# Altium PCB Micromouse_PCB_Final.PcbDoc (part 1 of 2)
Units mm, origin at the board's own origin, x right, y up, seen from the top; angles counter-clockwise.
Board outline 84.99 x 89.99 mm, 4 copper layers (Top Layer, Mid Layer (GND), Mid Layer (PWR), Bottom Layer), stack 1.591 mm thick; 98 components, 75 nets, 333 pads, 159 vias.
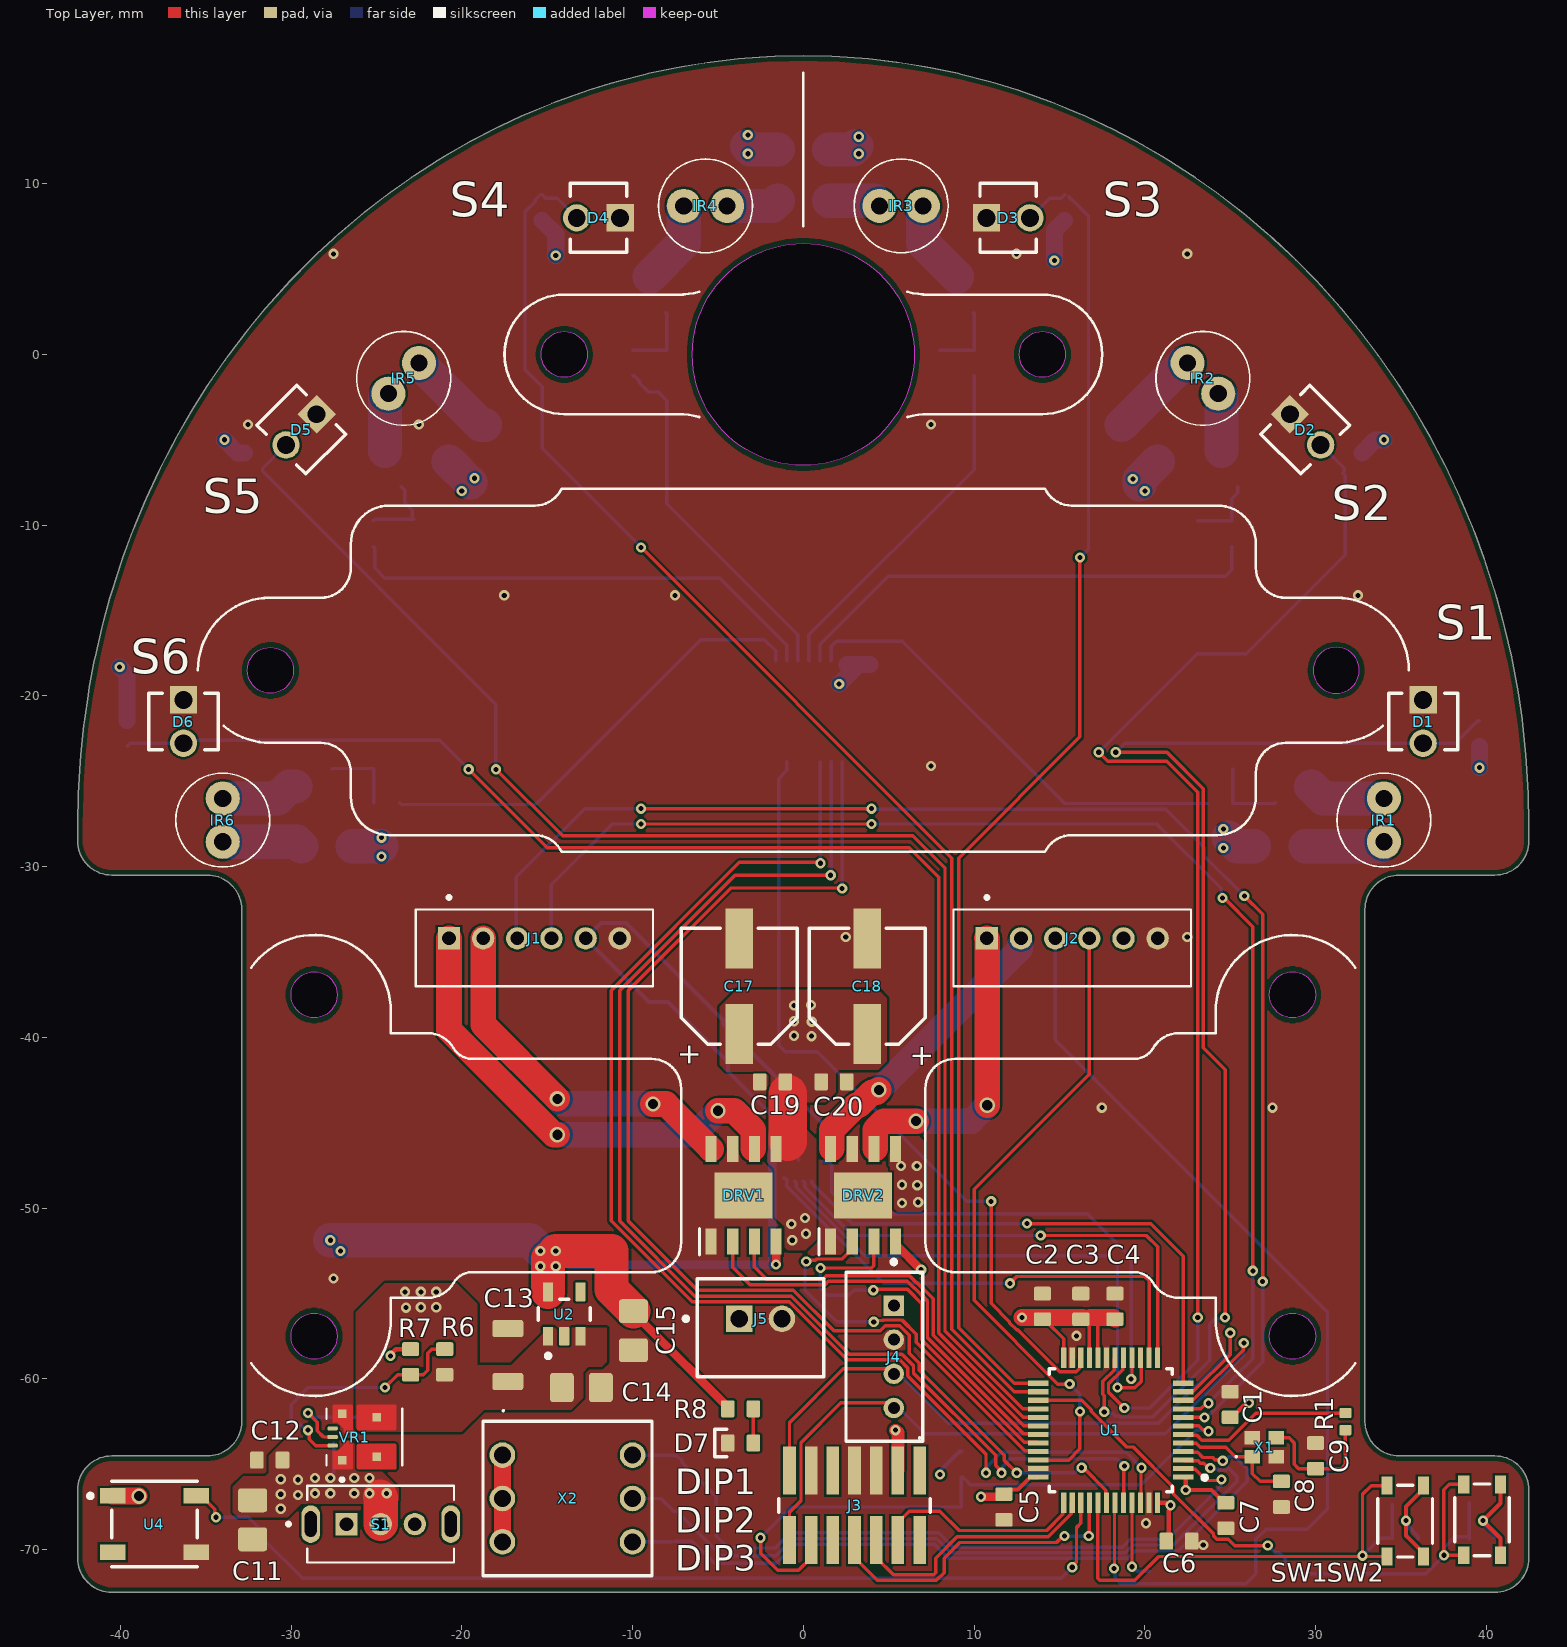
[diagram p0: Top Layer view]
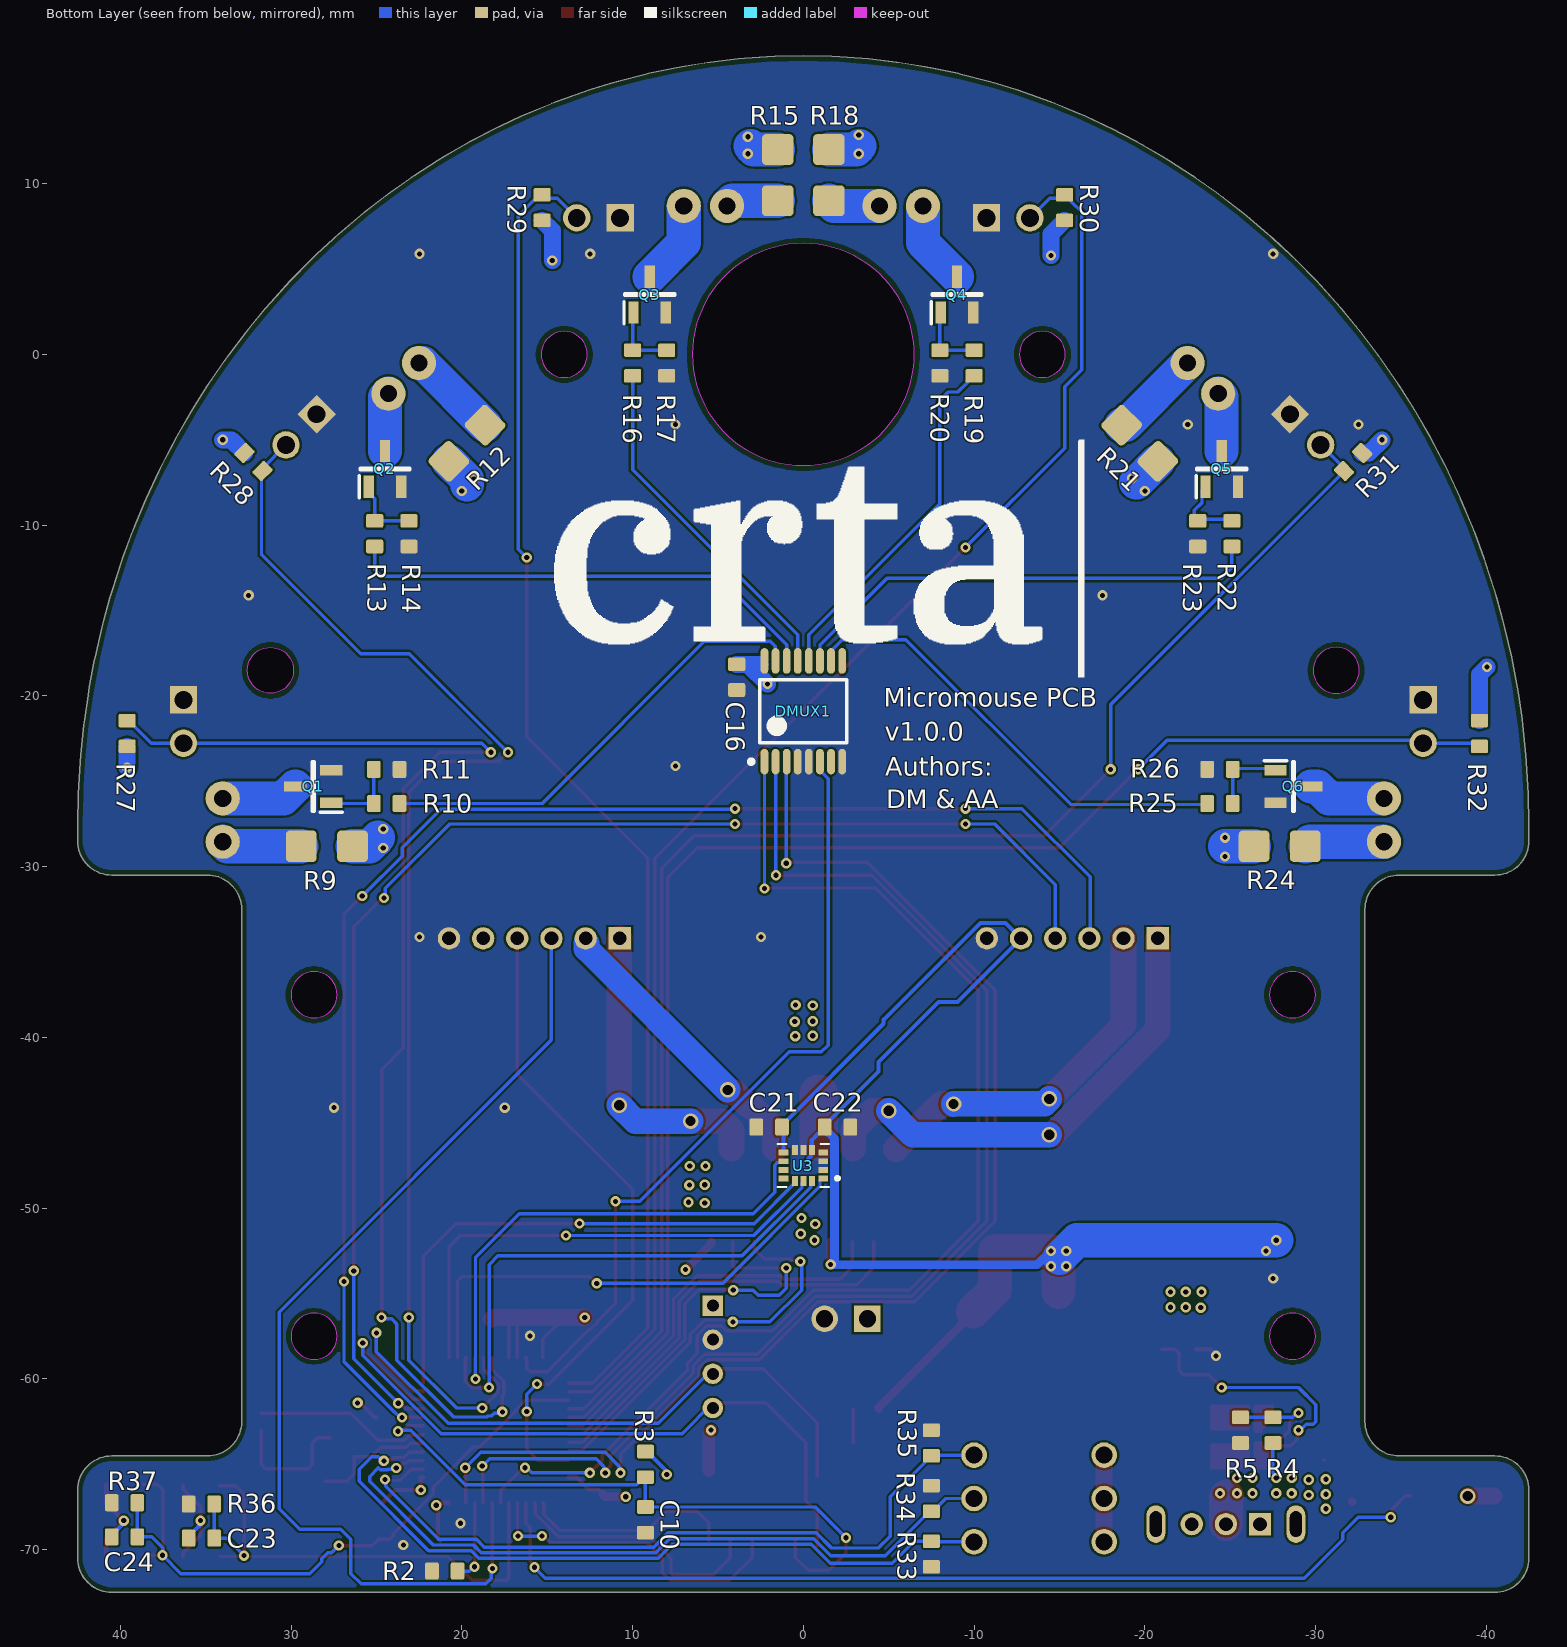
[diagram p1: Bottom Layer view, seen from below]
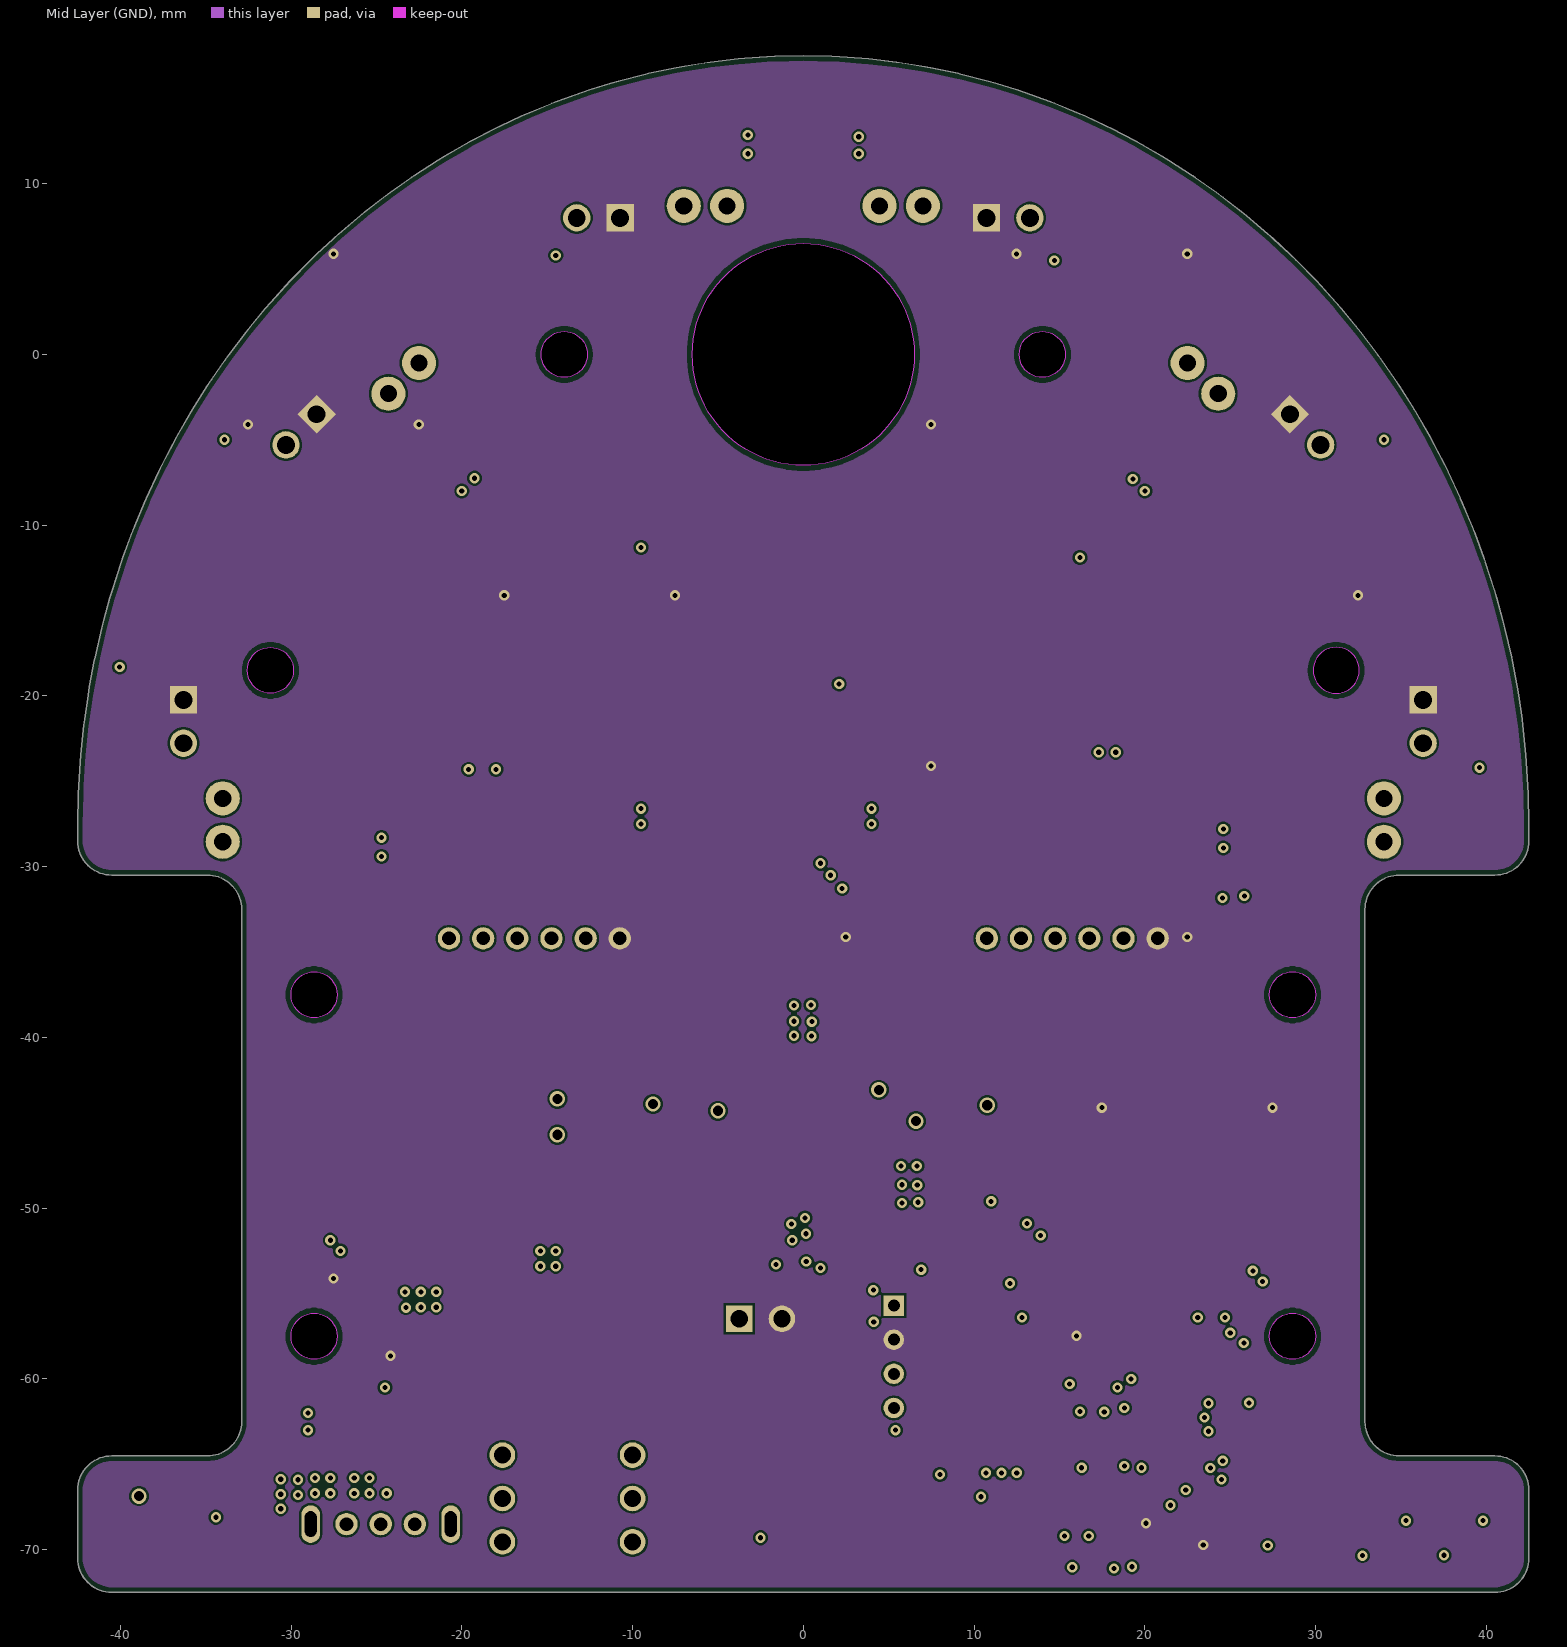
[diagram p2: Mid Layer (GND)]
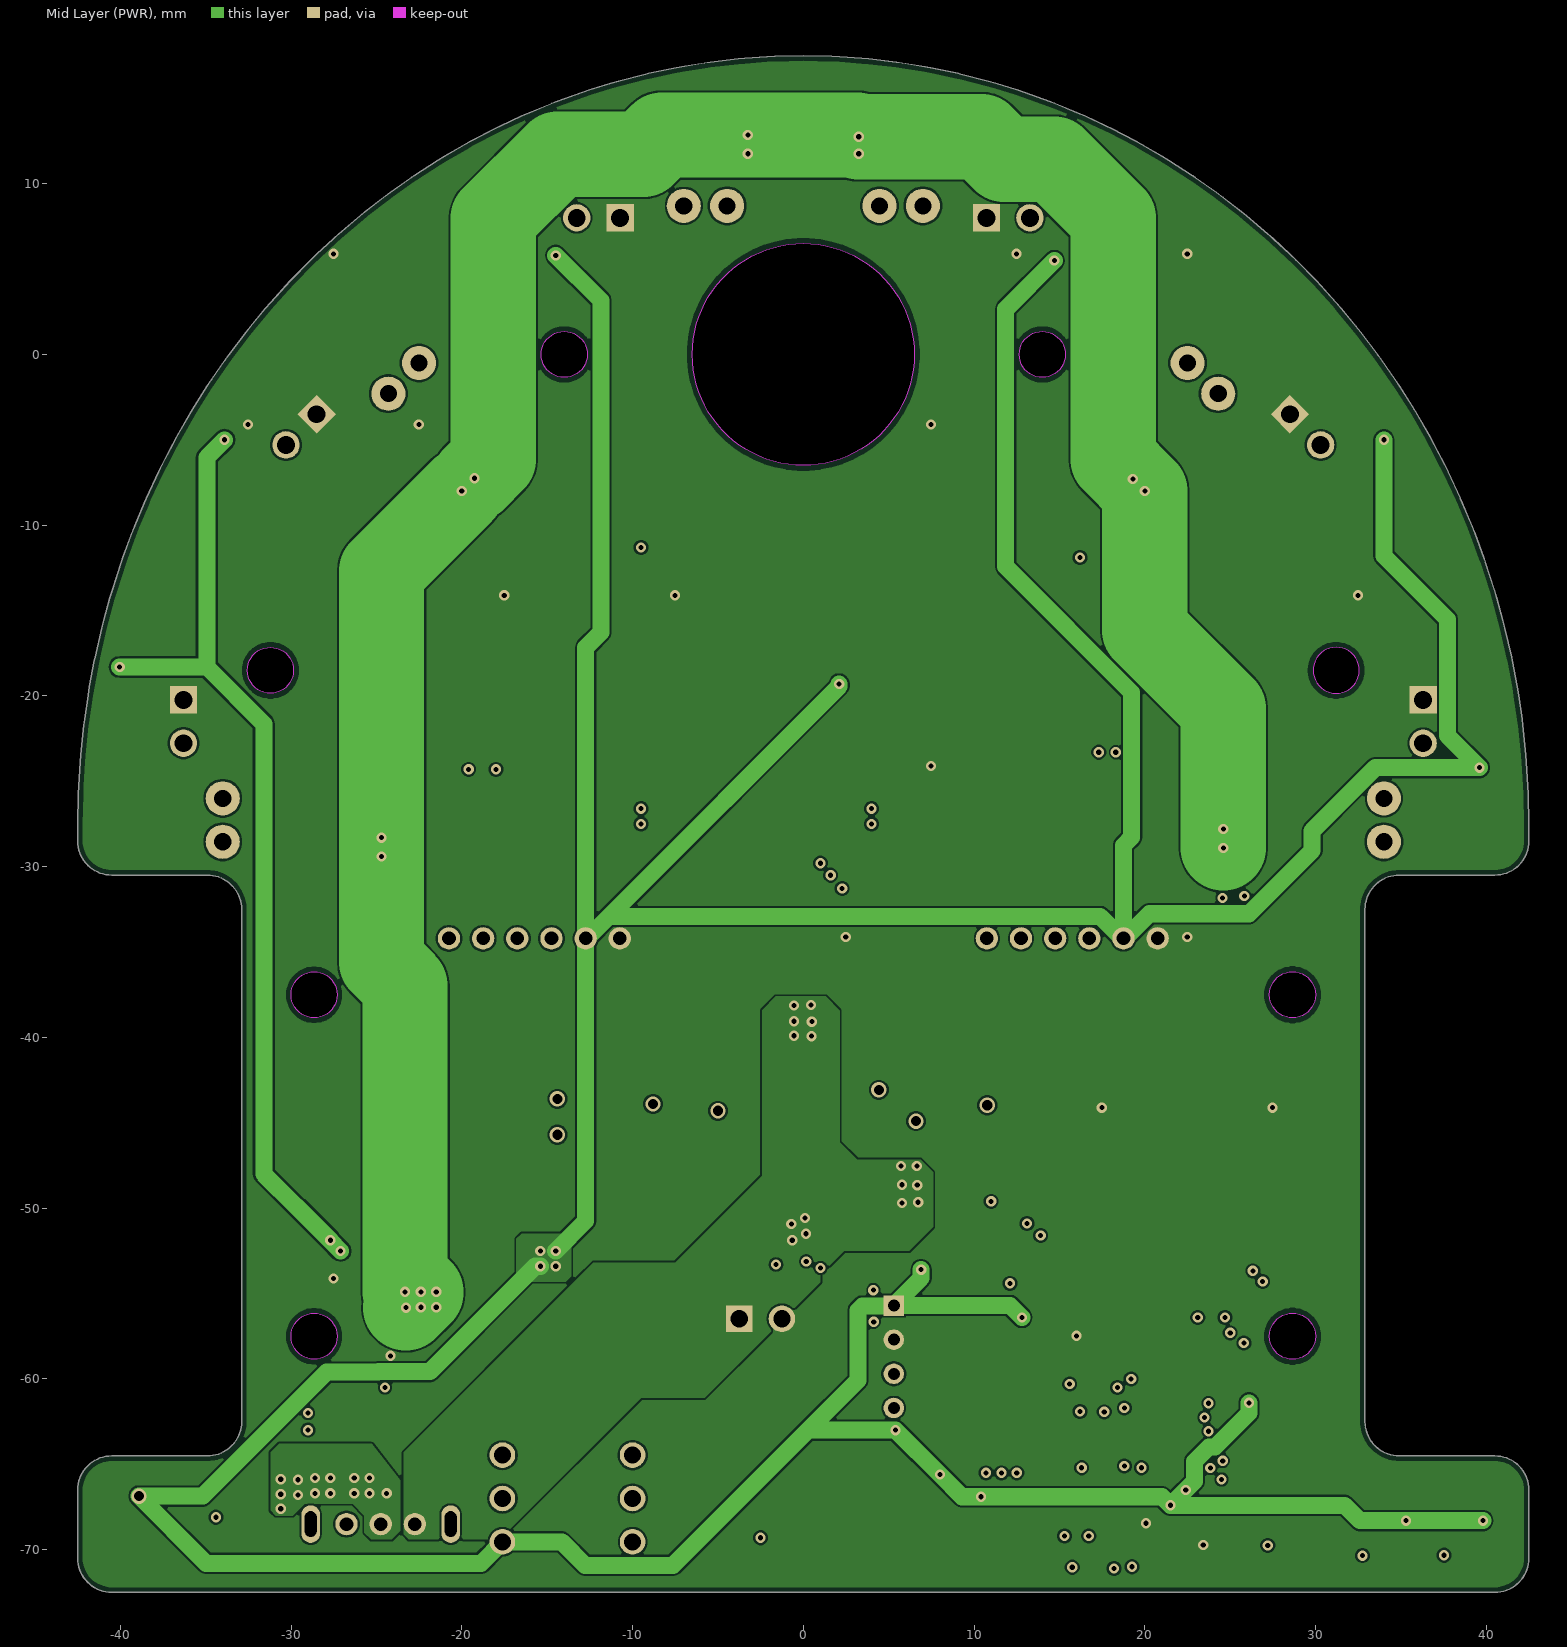
[diagram p3: Mid Layer (PWR)]
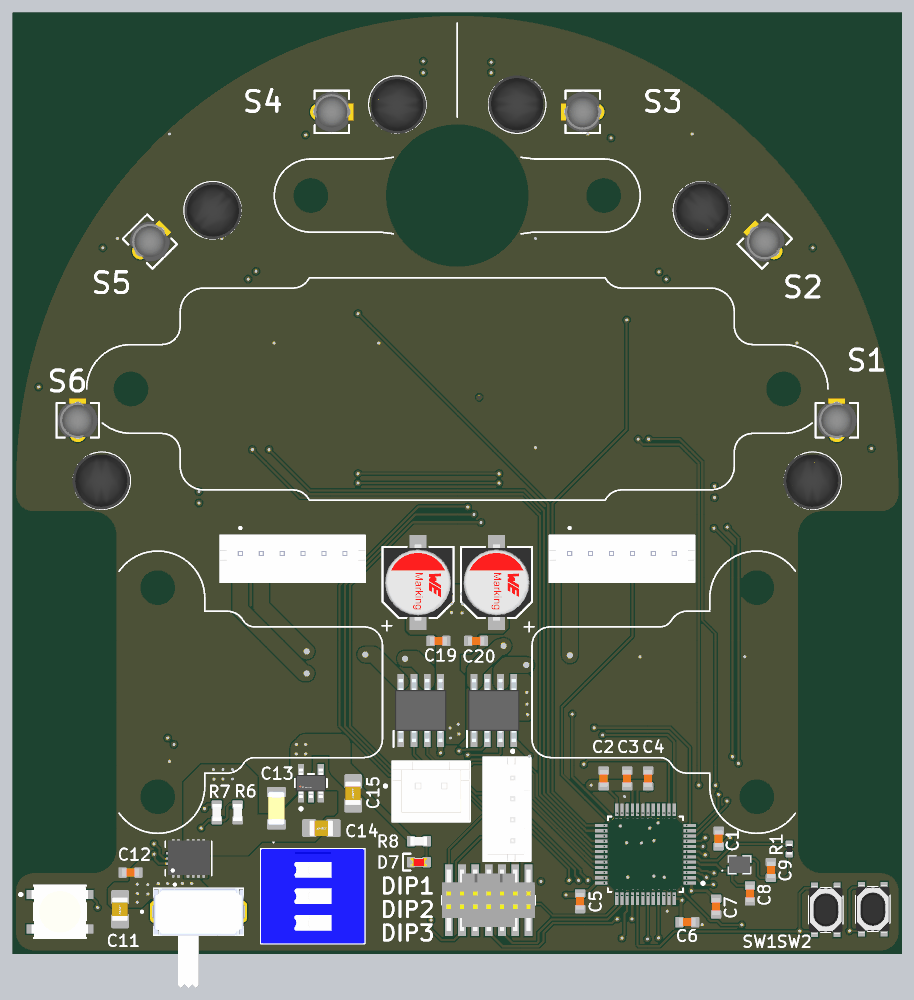
[diagram p5: 3D render of the assembled board from above, using the file's embedded part models]
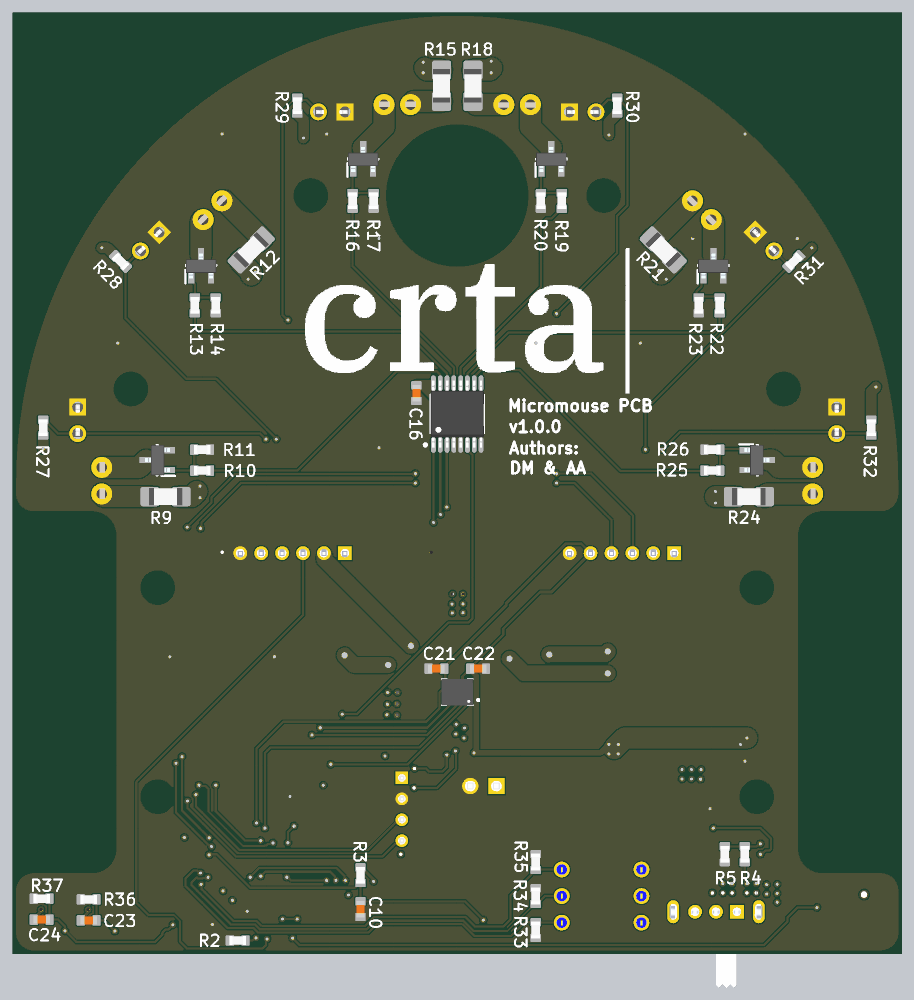
[diagram p6: 3D render of the assembled board from below, using the file's embedded part models]

## Layer stack, top to bottom
Top Solder: solder mask 0.0102, Solder Resist, Dk 3.5
Top Layer: signal copper 0.035
Dielectric 2: prepreg 0.2104, 7628, Dk 4.4
Mid Layer (GND): signal copper 0.0175
Dielectric 1: dielectric 1.065, FR-4, Dk 4.5
Mid Layer (PWR): signal copper 0.0175
Dielectric 3: prepreg 0.2104, 7628, Dk 4.4
Bottom Layer: signal copper 0.035
Bottom Solder: solder mask 0.0102, Solder Resist, Dk 3.5

## Board outline
-42.493,-70.5 -42.493,-66.5 cw(c-40.5,-66.5) -40.5,-64.507 -34.9,-64.507 ccw(c-34.9,-62.5) -32.893,-62.5 -32.893,-32.5 ccw(c-34.9,-32.5) -34.9,-30.493 -40.5,-30.493 cw(c-40.5,-28.5) -42.493,-28.5 -42.493,-27.5 -42.457,-25.746 -42.435,-25.25 -42.35,-23.871 -42.319,-23.454 -42.14,-21.722 -42.091,-21.359 -41.887,-19.957 -41.805,-19.459 -41.513,-17.907 -41.479,-17.73 -41.086,-16.032 -40.967,-15.569 -40.606,-14.258 -40.48,-13.824 -39.95,-12.172 -39.852,-11.899 -39.346,-10.519 -39.162,-10.049 -38.599,-8.694 -38.485,-8.427 -37.757,-6.863 -37.556,-6.461 -36.935,-5.264 -36.711,-4.847 -35.854,-3.353 -35.76,-3.201 -34.93,-1.886 -34.656,-1.473 -33.864,-0.329 -33.656,-0.035 -32.626,1.323 -32.369,1.642 -31.508,2.681 -31.193,3.048 -30.047,4.315 -28.85,5.528 -28.503,5.862 -27.522,6.774 -27.221,7.046 -25.938,8.136 -25.661,8.356 -24.581,9.195 -24.19,9.486 -22.948,10.365 -22.805,10.464 -21.394,11.371 -21,11.609 -19.87,12.265 -19.49,12.478 -18.013,13.249 -17.761,13.37 -16.481,13.966 -16.037,14.161 -14.735,14.697 -14.476,14.801 -12.916,15.361 -12.506,15.495 -11.268,15.877 -10.831,16.004 -9.227,16.419 -9.06,16.456 -7.594,16.764 -7.124,16.851 -5.8,17.067 -5.457,17.119 -3.821,17.308 -3.427,17.341 -2.125,17.432 -1.657,17.455 0,17.493 1.657,17.455 2.125,17.432 3.427,17.341 3.821,17.308 5.457,17.119 5.8,17.067 7.124,16.851 7.594,16.764 9.06,16.456 9.227,16.419 10.831,16.004 11.268,15.877 12.506,15.495 12.916,15.361 14.476,14.801 14.735,14.697 16.037,14.161 16.481,13.966 17.761,13.37 18.013,13.249 19.49,12.478 19.87,12.265 21,11.609 21.394,11.371 22.805,10.464 22.948,10.365 24.19,9.486 24.581,9.195 25.661,8.356 25.938,8.136 27.221,7.046 27.522,6.774 28.503,5.862 28.85,5.528 30.047,4.315 31.193,3.048 31.508,2.681 32.369,1.642 32.626,1.323 33.656,-0.035 33.864,-0.329 34.656,-1.473 34.93,-1.886 35.76,-3.201 35.854,-3.353 36.711,-4.847 36.935,-5.264 37.556,-6.461 37.757,-6.863 38.485,-8.427 38.599,-8.694 39.162,-10.049 39.346,-10.519 39.852,-11.899 39.95,-12.172 40.48,-13.824 40.606,-14.258 40.967,-15.569 41.086,-16.032 41.479,-17.73 41.513,-17.907 41.805,-19.459 41.887,-19.957 42.091,-21.359 42.14,-21.722 42.319,-23.454 42.35,-23.871 42.435,-25.25 42.457,-25.746 42.493,-27.5 42.493,-28.5 cw(c40.5,-28.5) 40.5,-30.493 34.9,-30.493 ccw(c34.9,-32.5) 32.893,-32.5 32.893,-62.5 ccw(c34.9,-62.5) 34.9,-64.507 40.5,-64.507 cw(c40.5,-66.5) 42.493,-66.5 42.493,-70.5 cw(c40.5,-70.5) 40.5,-72.493 -40.5,-72.493 cw(c-40.5,-70.5)
cut-out: 0,-6.5 cw(c0,0) -6.5,0 cw(c0,0) 0,6.5 cw(c0,0) 6.5,0 cw(c0,0)
cut-out: 29.859,-18.5 ccw(c31.208,-18.5) 31.208,-19.85 ccw(c31.208,-18.5) 32.558,-18.5 ccw(c31.208,-18.5) 31.208,-17.15 ccw(c31.208,-18.5)
cut-out: 14,-1.35 cw(c14,0) 12.65,0 cw(c14,0) 14,1.35 cw(c14,0) 15.35,0 cw(c14,0)
cut-out: 27.3,-37.5 cw(c28.65,-37.5) 28.65,-36.15 cw(c28.65,-37.5) 30,-37.5 cw(c28.65,-37.5) 28.65,-38.85 cw(c28.65,-37.5)
cut-out: 27.3,-57.5 cw(c28.65,-57.5) 28.65,-56.15 cw(c28.65,-57.5) 30,-57.5 cw(c28.65,-57.5) 28.65,-58.85 cw(c28.65,-57.5)
cut-out: -14,-1.35 cw(c-14,0) -15.35,0 cw(c-14,0) -14,1.35 cw(c-14,0) -12.65,0 cw(c-14,0)
cut-out: -31.208,-19.85 cw(c-31.208,-18.5) -32.558,-18.5 cw(c-31.208,-18.5) -31.208,-17.15 cw(c-31.208,-18.5) -29.859,-18.5 cw(c-31.208,-18.5)
cut-out: -30,-37.5 cw(c-28.65,-37.5) -28.65,-36.15 cw(c-28.65,-37.5) -27.3,-37.5 cw(c-28.65,-37.5) -28.65,-38.85 cw(c-28.65,-37.5)
cut-out: -30,-57.5 cw(c-28.65,-57.5) -28.65,-56.15 cw(c-28.65,-57.5) -27.3,-57.5 cw(c-28.65,-57.5) -28.65,-58.85 cw(c-28.65,-57.5)
cut-out: 14,-1.35 cw(c14,0) 12.65,0 cw(c14,0) 14,1.35 cw(c14,0) 15.35,0 cw(c14,0)
cut-out: 29.859,-18.5 ccw(c31.208,-18.5) 31.208,-19.85 ccw(c31.208,-18.5) 32.558,-18.5 ccw(c31.208,-18.5) 31.208,-17.15 ccw(c31.208,-18.5)
cut-out: -14,-1.35 cw(c-14,0) -15.35,0 cw(c-14,0) -14,1.35 cw(c-14,0) -12.65,0 cw(c-14,0)
cut-out: -31.208,-19.85 cw(c-31.208,-18.5) -32.558,-18.5 cw(c-31.208,-18.5) -31.208,-17.15 cw(c-31.208,-18.5) -29.859,-18.5 cw(c-31.208,-18.5)

## Design rules (kind name [scope] priority, off if disabled: settings)
BoardOutlineClearance [All] p1: gap=0.3 ignorepadtopadclearanceinfootprint=FALSE
Clearance [All] p1: gap=0.127 ignorepadtopadclearanceinfootprint=TRUE
MinimumAnnularRing [All] p1: minimumring=0.15
MinimumSolderMaskSliver [All] p1: minsoldermaskwidth=0.13
PlaneConnect [All] p1: planeconnectstyle=Direct reliefexpansion=0.508 reliefentries=4 reliefconductorwidth=0.25 reliefairgap=0.2
PolygonConnect [All] p1: connectstyle=Direct reliefconductorwidth=0.254 reliefentries=4 polygonreliefangle="90 Angle" airgapwidth=0.254
RoutingVias [All] p1: holewidth=0.3 width=0.6 viastyle="Through Hole" minholewidth=0.3 minwidth=0.45 maxholewidth=0.75 maxwidth=0.9
SilkToSolderMaskClearance [IsPad] p1: minsilkscreentomaskgap=0.1 clearancetoexposedcopper=TRUE
SolderMaskExpansion [All] p1: expansion=0 istentingtop=FALSE
SupplyNets "Schematic Supply Nets_3" [InNet('+5v')] p1: voltage=0.000
SupplyNets "Schematic Supply Nets_2" [InNet('+3v3')] p2: voltage=0.000
SupplyNets "Schematic Supply Nets_1" [InNet('GND')] p3: voltage=0.000
SupplyNets "Schematic Supply Nets" [InNet('VBAT')] p4: voltage=0.000
UnRoutedNet [All] p1: checkbadconnections=TRUE
Width [All] p1: maxlimit=5 minlimit=0.127 preferedwidth=0.2
26 further rules are at their usual default settings.

## Components (designator, comment, footprint, x,y, rotation, side; value= is the part's Value field where it differs from the comment)
C1 "4u7" CAP_0603 25,-61.5 r270 top
C2 "100n" CAP_0603 14,-55.75 r270 top
C3 "100n" CAP_0603 16.25,-55.75 r270 top
C4 "100n" CAP_0603 18.25,-55.75 r270 top
C5 "100n" CAP_0603 11.75,-67.5 r90 top
C6 "100n" CAP_0603 22,-69.5 r180 top
C7 "100n" CAP_0603 24.75,-68 r90 top
C8 "6p8" CAP_0603 28,-66.75 r90 top
C9 "6p8" CAP_0603 30,-64.5 r270 top
C10 "100n" CAP_0603 9.25,-68.25 r270 bottom
C11 "10u" CAP_0805 -32.25,-68.25 r90 top
C12 "100n" CAP_0603 -31.25,-64.75 r0 top
C13 "47u" CAP_1206 -17.3,-58.6 r270 top
C14 "1u" CAP_0805 -13,-60.5 r180 top
C15 "1u" CAP_0805 -9.95,-57.175 r90 top
C16 "100n" CAP_0603 3.9,-18.9 r90 bottom
C17 "47u" WCAP-ASLI_D6.3H5.5 -3.75,-37 r270 top
C18 "47u" WCAP-ASLI_D6.3H5.5 3.75,-37 r270 top
C19 "100n" CAP_0603 -1.8,-42.6 r0 top
C20 "100n" CAP_0603 1.8,-42.6 r180 top
C21 "100n" CAP_0603 2,-45.25 r0 bottom
C22 "100n" CAP_0603 -2,-45.25 r180 bottom
C23 "100n" CAP_0603 35.25,-69.325 r180 bottom
C24 "100n" CAP_0603 39.75,-69.25 r180 bottom
D1 "TEFT4300" FP-6_544-5269_01-4-MFG 36.3,-21.5 r270 top
D2 "TEFT4300" FP-6_544-5269_01-4-MFG 29.4,-4.4 r315 top
D3 "TEFT4300" FP-6_544-5269_01-4-MFG 12,8 r0 top
D4 "TEFT4300" FP-6_544-5269_01-4-MFG -12,8 r180 top
D5 "TEFT4300" FP-6_544-5269_01-4-MFG -29.4,-4.4 r225 top
D6 "TEFT4300" FP-6_544-5269_01-4-MFG -36.3,-21.5 r270 top
D7 "RED" LED_0603_RED -3.675,-63.75 r0 top
DMUX1 "SN74AHC238PWR" TSOP65P640X120-16N 0,-20.9 r90 bottom
DRV1 "DRV8251DDAR" SOIC127P600X170-9N -3.5,-49.25 r90 top
DRV2 "DRV8251DDAR" SOIC127P600X170-9N 3.5,-49.25 r90 top
IR1 "SFH_4545" SFH4545 34,-26 r270 top
IR2 "SFH_4545" SFH4545 24.3,-2.3 r135 top
IR3 "SFH_4545" SFH4545 7,8.7 r180 top
IR4 "SFH_4545" SFH4545 -7,8.7 r0 top
IR5 "SFH_4545" SFH4545 -24.3,-2.3 r45 top
IR6 "SFH_4545" SFH4545 -34,-26 r270 top
J1 "JST-PH-Left-Motor" JST_B6B-PH-K-S(LF)(SN) -15.75,-34.75 r180 top
J2 "JST-PH-Right-Motor" JST_B6B-PH-K-S(LF)(SN) 15.75,-34.75 r180 top
J3 "STDC14 - SWD" FTSH10701LDVKTR 3,-67.4 r180 top
J4 "B4B-PH-K(LF)(SN)" FP-B4B-PH-K_LF_SN-MFG 4.75,-58.7 r90 top
J5 "B2B-XH-A(LF)(SN)" FP-B2B-XH-A_LF_SN-MFG -2.5,-57 r0 top
Q1 "IRLML6344TRPBF" SOT95P237X112-3N 28.7,-25.3 r0 bottom
Q2 "IRLML6344TRPBF" SOT95P237X112-3N 24.5,-6.7 r90 bottom
Q3 "IRLML6344TRPBF" SOT95P237X112-3N 9,3.5 r90 bottom
Q4 "IRLML6344TRPBF" SOT95P237X112-3N -9,3.5 r90 bottom
Q5 "IRLML6344TRPBF" SOT95P237X112-3N -24.5,-6.7 r90 bottom
Q6 "IRLML6344TRPBF" SOT95P237X112-3N -28.7,-25.3 r180 bottom
R1 "0R" RES_0402 31.75,-62.5 r90 top
R2 "10k" RES_0603 21,-71.25 r180 bottom
R3 "10k" RES_0603 9.25,-65 r270 bottom
R4 "10k" RES_0603 -27.5,-63 r270 bottom
R5 "2k2" RES_0603 -25.6,-63 r90 bottom
R6 "220k" RES_0603 -21,-59 r270 top
R7 "30k" RES_0603 -23,-59 r270 top
R8 "1k" RES_0603 -3.675,-61.75 r180 top
R9 "18" RES_1206 27.9,-28.8 r180 bottom
R10 "100R" RES_0603 24.4,-26.3 r0 bottom
R11 "100k" RES_0603 24.4,-24.3 r0 bottom
R12 "18" RES_1206 19.7,-5.2 r315 bottom
R13 "100R" RES_0603 25.1,-10.5 r90 bottom
R14 "100k" RES_0603 23.1,-10.5 r90 bottom
R15 "18" RES_1206 1.5,10.5 r90 bottom
R16 "100R" RES_0603 10,-0.5 r90 bottom
R17 "100k" RES_0603 8,-0.5 r90 bottom
R18 "18" RES_1206 -1.5,10.5 r90 bottom
R19 "100R" RES_0603 -10,-0.5 r90 bottom
R20 "100k" RES_0603 -8,-0.5 r90 bottom
R21 "18" RES_1206 -19.7,-5.2 r225 bottom
R22 "100R" RES_0603 -25.1,-10.5 r90 bottom
R23 "100k" RES_0603 -23.1,-10.5 r90 bottom
R24 "18" RES_1206 -27.9,-28.8 r0 bottom
R25 "100R" RES_0603 -24.4,-26.3 r180 bottom
R26 "100k" RES_0603 -24.4,-24.3 r180 bottom
R27 "10k" RES_0603 39.6,-22.2 r270 bottom
R28 "10k" RES_0603 32.2,-6.3 r45 bottom
R29 "10k" RES_0603 15.3,8.6 r270 bottom
R30 "10k" RES_0603 -15.3,8.6 r270 bottom
R31 "10k" RES_0603 -32.2,-6.3 r135 bottom
R32 "10k" RES_0603 -39.6,-22.2 r90 bottom
R33 "10k" RES_0603 -7.5,-70.25 r90 bottom
R34 "10k" RES_0603 -7.5,-67 r270 bottom
R35 "10k" RES_0603 -7.5,-63.75 r270 bottom
R36 "10k" RES_0603 35.25,-67.325 r180 bottom
R37 "10k" RES_0603 39.75,-67.25 r180 bottom
S1 "Switch" SW_SLW-864574-5A-RA-N-D -24.75,-68.5 r0 top
SW1 "434123025826" 434123025826 35.25,-68.325 r90 top
SW2 "434123025826" 434123025826 39.75,-68.25 r90 top
U1 "STM32G474CET6" FP-STM32G474CET6-MFG 18,-63 r180 top
U2 "TPS7A2033PDBVR" FP-DBV0005A-MFG -14,-56.2 r90 top
U3 "LSM6DSO32TR" XDCR_LSM6DSO32TR 0,-47.5 r0 bottom
U4 "WS2812B" ADAI-WS2812B_V -38,-68.5 r0 top
VR1 "TPSM863252RDXR" VREG_TPSM863252RDXR -25.665,-63.4 r90 top
X1 "24 MHz HSE" CX2016FB24000B0FZZH1 27,-64 r0 top
X2 "DS01C-254-S-03BE" DS01C254S03BE -17.62,-64.46 r270 top

## Footprints (in the part's own frame and the unit in brackets; to place one, negate y for a bottom-side part, rotate by r counter-clockwise, add the part's x,y. Pads: shape width x height; smd on the part's side, far side on the other; paste and mask are expansions set on the pad)
434123025826 [mm] "Tact Switch, SMD, body 4.2x3.2mm"
  rect 1.05x0.65 smd: A1(-2.075,1.075) A2(2.075,1.075) B1(-2.075,-1.075) B2(2.075,-1.075)
  silkscreen extent -2.1,-1.6 2.1,1.6, body extent -2.3,-1.6 2.3,1.6, height 2.5
ADAI-WS2812B_V [mm] "SMD, 4-Leads, Body 5x5mm, Pitch 3.3mm"
  rect 1.5x0.9 smd: 1(-2.45,1.65) 2(-2.45,-1.65) 3(2.45,-1.65) 4(2.45,1.65)
  silkscreen extent -3.87,-2.5 2.5,2.5, body extent -2.7,-2.5 2.7,2.5, height 1.69
CAP_0603 [mm]
  rrect25% 0.8x1 smd: 1(-0.75,0) 2(0.75,0)
  body extent -0.8,-0.4 0.8,0.4, height 0.51
CAP_0805 [mm]
  rrect25% 1.4x1.7 smd: 1(-1.143,0) 2(1.143,0)
  body extent -1.15,-0.76 1.15,0.79, height 1.01
CAP_1206 [mm]
  rrect25% 1x1.8 smd: 1(-1.55,0) 2(1.55,0)
  body extent -1.6,-0.8 1.6,0.8, height 0.94
CX2016FB24000B0FZZH1 [mm]
  rect 0.9x0.8 smd: 1(-0.7,-0.55) 2(0.7,-0.55) 3(0.7,0.55) 4(-0.7,0.55)
  silkscreen extent -1.7,-0.6 -1.6,-0.5, body extent -1.07,-0.87 1.07,0.87, height 0.65
DS01C254S03BE [mm]
  round 1.5 hole 1: 1(0,0) 2(0,7.62) 3(2.54,0) 4(2.54,7.62) 5(5.08,0) 6(5.08,7.62)
  silkscreen extent -2.65,-1.14 7.06,8.76, body extent -1.96,-1.14 7.08,8.76, height 6.55
FP-6_544-5269_01-4-MFG [mm]
  rect 1.6x1.6 hole 1.05 paste-2539.97 mask+0: 1(-1.27,0)
  round 1.6 hole 1.05 paste-2539.97 mask+0: 2(1.27,0)
  silkscreen extent -1.65,-2.02 1.65,2.02, body extent -2.17,-2.12 2.17,2.12, height 0.25
FP-B2B-XH-A_LF_SN-MFG [mm]
  rect 1.55x1.55 hole 1 paste-2539.97 mask+0: 1(-1.25,0.525)
  round 1.55 hole 1 paste-2539.97 mask+0: 2(1.25,0.525)
  silkscreen extent -4.5,-2.88 3.7,2.88, body extent -3.8,-2.98 3.8,2.98, height 0.25
FP-B4B-PH-K_LF_SN-MFG [mm]
  rect 1.2x1.2 hole 0.7 paste-2539.97 mask+0: 1(3,-0.55)
  round 1.2 hole 0.7 paste-2539.97 mask+0: 2(1,-0.55) 3(-1,-0.55) 4(-3,-0.55)
  silkscreen extent -4.95,-2.25 5.67,2.25, body extent -5.05,-2.35 5.05,2.35, height 0.25
FP-DBV0005A-MFG [mm]
  rrect17% 1.1x0.6 smd paste+0 mask+0: 1(-1.3,0.95) 2(-1.3,0) 3(-1.3,-0.95) 4(1.3,-0.95) 5(1.3,0.95)
  silkscreen extent -2.57,-1.53 0.87,1.53, body extent -1.95,-1.78 1.95,1.78, height 0.25
FP-STM32G474CET6-MFG [mm]
  rect 1.2x0.3 smd paste+0 mask+0: 1(-4.25,2.75) 2(-4.25,2.25) 3(-4.25,1.75) 4(-4.25,1.25) 5(-4.25,0.75) 6(-4.25,0.25) 7(-4.25,-0.25) 8(-4.25,-0.75) 9(-4.25,-1.25) 10(-4.25,-1.75) 11(-4.25,-2.25) 12(-4.25,-2.75) 25(4.25,-2.75) 26(4.25,-2.25) 27(4.25,-1.75) 28(4.25,-1.25) 29(4.25,-0.75) 30(4.25,-0.25) 31(4.25,0.25) 32(4.25,0.75) 33(4.25,1.25) 34(4.25,1.75) 35(4.25,2.25) 36(4.25,2.75)
  rect 0.3x1.2 smd paste+0 mask+0: 13(-2.75,-4.25) 14(-2.25,-4.25) 15(-1.75,-4.25) 16(-1.25,-4.25) 17(-0.75,-4.25) 18(-0.25,-4.25) 19(0.25,-4.25) 20(0.75,-4.25) 21(1.25,-4.25) 22(1.75,-4.25) 23(2.25,-4.25) 24(2.75,-4.25) 37(2.75,4.25) 38(2.25,4.25) 39(1.75,4.25) 40(1.25,4.25) 41(0.75,4.25) 42(0.25,4.25) 43(-0.25,4.25) 44(-0.75,4.25) 45(-1.25,4.25) 46(-1.75,4.25) 47(-2.25,4.25) 48(-2.75,4.25)
  silkscreen extent -5.63,-3.6 3.6,3.6, body extent -4.95,-4.95 4.95,4.95, height 0.25
FTSH10701LDVKTR [mm]
  rect 0.74x2.79 smd: 1(-3.81,-2.035) 2(-3.81,2.035) 3(-2.54,-2.035) 4(-2.54,2.035) 5(-1.27,-2.035) 6(-1.27,2.035) 7(0,-2.035) 8(0,2.035) 9(1.27,-2.035) 10(1.27,2.035) 11(2.54,-2.035) 12(2.54,2.035) 13(3.81,-2.035) 14(3.81,2.035)
  silkscreen extent -4.44,-4 4.44,0.4, body extent -4.44,-2.92 4.44,2.92, height 6.12
JST_B6B-PH-K-S(LF)(SN) [mm]
  rect 1.308x1.308 / inner round 1.308 / far side rect 1.308x1.308 hole 0.8: 1(5,-0.55)
  round 1.308 hole 0.8: 2(3,-0.55) 3(1,-0.55) 4(-1,-0.55) 5(-3,-0.55) 6(-5,-0.55)
  silkscreen extent -6.95,-3.05 6.95,2.25, body extent -6.95,-2.21 6.95,2.29, height 6
LED_0603_RED [mm]
  rrect25% 0.8x1 smd: A(0.75,0) K(-0.75,0)
  silkscreen extent -1.5,-0.8 -0.8,0.8, body extent -0.8,-0.4 0.8,0.4, height 0.6
RES_0402 [mm]
  rrect25% 0.6x0.7 smd: 1(-0.5,0) 2(0.5,0)
  body extent -0.5,-0.25 0.5,0.25, height 0.3
RES_0603 [mm]
  rrect25% 0.8x1 smd: 1(-0.75,0) 2(0.75,0)
  body extent -0.8,-0.43 0.8,0.43, height 0.52
RES_1206 [mm]
  rrect25% 1.8x1.84 smd: 1(-1.5,0) 2(1.5,0)
  body extent -1.6,-0.83 1.6,0.83, height 0.57
SFH4545 [mm]
  round 2 hole 1: 1(0,0) 2(2.54,0)
  silkscreen extent -1.48,-2.75 4.02,2.75, body extent -1.23,-2.79 4.02,2.71, height 7.7
SOIC127P600X170-9N [mm]
  rect 1.525x0.65 smd: 1(-2.712,1.905) 2(-2.712,0.635) 3(-2.712,-0.635) 4(-2.712,-1.905) 5(2.712,-1.905) 6(2.712,-0.635) 7(2.712,0.635) 8(2.712,1.905)
  rect 2.71x3.4 smd: 9(0,0)
  silkscreen extent -3.47,2.58 -1.95,2.58, body extent -3,-2.45 3,2.45, height 1.7
SOT95P237X112-3N [mm]
  rect 1.3x0.6 smd: 1(-1.05,0.95) 2(-1.05,-0.95) 3(1.05,0)
  silkscreen extent -1.7,-1.46 0.05,1.5, body extent -1.23,-1.46 1.14,1.46, height 1.12
SW_SLW-864574-5A-RA-N-D [mm]
  rect 1.308x1.308 / inner round 1.308 / far side rect 1.308x1.308 hole 0.8: 1(-2,0)
  round 1.308 hole 0.8: 2(0,0) 3(2,0)
  oval 1.1x2.2 hole 0.7 slot 1.5 at 90 deg: SH1(-4.1,0) SH2(4.1,0)
  silkscreen extent -5.5,-2.25 4.3,2.25, body extent -4.28,-7.29 4.32,2.21, height 4.71
TSOP65P640X120-16N [mm] "TSOP, 16-Leads, Body 5.00x4.40mm, Pitch 0.65mm, IPC Medium Density"
  oval 1.5x0.45 smd: 1(-2.95,2.275) 2(-2.95,1.625) 3(-2.95,0.975) 4(-2.95,0.325) 5(-2.95,-0.325) 6(-2.95,-0.975) 7(-2.95,-1.625) 8(-2.95,-2.275) 9(2.95,-2.275) 10(2.95,-1.625) 11(2.95,-0.975) 12(2.95,-0.325) 13(2.95,0.325) 14(2.95,0.975) 15(2.95,1.625) 16(2.95,2.275)
  silkscreen extent -3.07,-2.55 1.85,3.17, body extent -3.2,-2.55 3.2,2.55, height 1.2
VREG_TPSM863252RDXR [mm]
  rect 0.5x0.5 smd paste-1 mask+0: 1(-1.362,1.338) 2(-1.15,-0.675) 3(1.15,-0.675) 4(1.362,1.338)
  rrect50% 0.22x0.6 smd mask+0: 5(0.5,1.9) 6(0,1.9) 7(-0.5,1.9)
  Top Layer region: -0.49,0.474 -0.484,0.474 -0.479,0.473 -0.474,0.472 -0.469,0.47 -0.464,0.468 -0.459,0.466 -0.455,0.464 -0.45,0.462 -0.446,0.459 -0.441,0.456 -0.437,0.453 -0.433,0.449 -0.429,0.446 -0.426,0.442 -0.422,0.438 -0.419,0.434 -0.416,0.429 -0.413,0.425 -0.411,0.42 -0.409,0.416 -0.407,0.411 -0.405,0.406 -0.403,0.401 -0.402,0.396 -0.401,0.391 -0.401,0.385 -0.4,0.38 -0.4,0.375 -0.4,-1.725 -0.4,-1.73 -0.401,-1.735 -0.401,-1.741 -0.402,-1.746 -0.403,-1.751 -0.405,-1.756 -0.407,-1.761 -0.409,-1.766 -0.411,-1.77 -0.413,-1.775 -0.416,-1.779 -0.419,-1.784 -0.422,-1.788 -0.426,-1.792 -0.429,-1.796 -0.433,-1.799 -0.437,-1.803 -0.441,-1.806 -0.446,-1.809 -0.45,-1.812 -0.455,-1.814 -0.459,-1.816 -0.464,-1.818 -0.469,-1.82 -0.474,-1.822 -0.479,-1.823 -0.484,-1.824 -0.49,-1.824 -0.495,-1.825 -1.805,-1.825 -1.81,-1.824 -1.816,-1.824 -1.821,-1.823 -1.826,-1.822 -1.831,-1.82 -1.836,-1.818 -1.841,-1.816 -1.845,-1.814 -1.85,-1.812 -1.854,-1.809 -1.859,-1.806 -1.863,-1.803 -1.867,-1.799 -1.871,-1.796 -1.874,-1.792 -1.878,-1.788 -1.881,-1.784 -1.884,-1.779 -1.887,-1.775 -1.889,-1.77 -1.891,-1.766 -1.893,-1.761 -1.895,-1.756 -1.897,-1.751 -1.898,-1.746 -1.899,-1.741 -1.899,-1.735 -1.9,-1.73 -1.9,-1.725 -1.9,0.375 -1.9,0.38 -1.899,0.385 -1.899,0.391 -1.898,0.396 -1.897,0.401 -1.895,0.406 -1.893,0.411 -1.891,0.416 -1.889,0.42 -1.887,0.425 -1.884,0.429 -1.881,0.434 -1.878,0.438 -1.874,0.442 -1.871,0.446 -1.867,0.449 -1.863,0.453 -1.859,0.456 -1.854,0.459 -1.85,0.462 -1.845,0.464 -1.841,0.466 -1.836,0.468 -1.831,0.47 -1.826,0.472 -1.821,0.473 -1.816,0.474 -1.81,0.474 -1.805,0.475 -0.495,0.475
  Top Layer region: 205 vertices and 0 holes, not listed, extent -1.9,0.725 -0.255,1.9
  Top Layer region: 1.81,0.474 1.816,0.474 1.821,0.473 1.826,0.472 1.831,0.47 1.836,0.468 1.841,0.466 1.845,0.464 1.85,0.462 1.854,0.459 1.859,0.456 1.863,0.453 1.867,0.449 1.871,0.446 1.874,0.442 1.878,0.438 1.881,0.434 1.884,0.429 1.887,0.425 1.889,0.42 1.891,0.416 1.893,0.411 1.895,0.406 1.897,0.401 1.898,0.396 1.899,0.391 1.899,0.385 1.9,0.38 1.9,0.375 1.9,-1.725 1.9,-1.73 1.899,-1.735 1.899,-1.741 1.898,-1.746 1.897,-1.751 1.895,-1.756 1.893,-1.761 1.891,-1.766 1.889,-1.77 1.887,-1.775 1.884,-1.779 1.881,-1.784 1.878,-1.788 1.874,-1.792 1.871,-1.796 1.867,-1.799 1.863,-1.803 1.859,-1.806 1.854,-1.809 1.85,-1.812 1.845,-1.814 1.841,-1.816 1.836,-1.818 1.831,-1.82 1.826,-1.822 1.821,-1.823 1.816,-1.824 1.81,-1.824 1.805,-1.825 0.495,-1.825 0.49,-1.824 0.484,-1.824 0.479,-1.823 0.474,-1.822 0.469,-1.82 0.464,-1.818 0.459,-1.816 0.455,-1.814 0.45,-1.812 0.446,-1.809 0.441,-1.806 0.437,-1.803 0.433,-1.799 0.429,-1.796 0.426,-1.792 0.422,-1.788 0.419,-1.784 0.416,-1.779 0.413,-1.775 0.411,-1.77 0.409,-1.766 0.407,-1.761 0.405,-1.756 0.403,-1.751 0.402,-1.746 0.401,-1.741 0.401,-1.735 0.4,-1.73 0.4,-1.725 0.4,0.375 0.4,0.38 0.401,0.385 0.401,0.391 0.402,0.396 0.403,0.401 0.405,0.406 0.407,0.411 0.409,0.416 0.411,0.42 0.413,0.425 0.416,0.429 0.419,0.434 0.422,0.438 0.426,0.442 0.429,0.446 0.433,0.449 0.437,0.453 0.441,0.456 0.446,0.459 0.45,0.462 0.455,0.464 0.459,0.466 0.464,0.468 0.469,0.47 0.474,0.472 0.479,0.473 0.484,0.474 0.49,0.474 0.495,0.475 1.805,0.475
  Top Layer region: 205 vertices and 0 holes, not listed, extent 0.255,0.725 1.9,1.9
  silkscreen extent -2.6,-2.17 1.65,2.25, body extent -1.6,-2 1.7,2, height 2.1
WCAP-ASLI_D6.3H5.5 [mm] "Aluminium Electrolytic V-Chip SMT Capacitors, 6.3x5.5mm"
  rect 3.5x1.6 smd: 1(2.8,0) 2(-2.8,0)
  silkscreen extent -3.4,-3.4 3.4,3.4, body extent -3.65,-3.3 3.65,3.3, height 5.5
XDCR_LSM6DSO32TR [mm]
  rect 0.575x0.35 smd mask+0: 1(-1.162,0.75) 2(-1.162,0.25) 3(-1.162,-0.25) 4(-1.162,-0.75) 8(1.162,-0.75) 9(1.162,-0.25) 10(1.162,0.25) 11(1.162,0.75)
  rect 0.35x0.575 smd mask+0: 5(-0.5,-0.913) 6(0,-0.913) 7(0.5,-0.913) 12(0.5,0.913) 13(0,0.913) 14(-0.5,0.913)
  silkscreen extent -2.1,-1.25 1.5,1.25, body extent -1.5,-1.25 1.5,1.25, height 0.86

## Part data
C1 C2 C3 C4 C5 C6 C7 C8 C9 C10 C12 C16 C19 C20 C21 C22 C23 C24: library part CAP_0603, "Capacitor SMD 0603"
C11 C14 C15: library part CAP_0805, "Capacitor SMD 0805"
C13: library part CAP_1206, "Capacitor SMD 1206"
C17 C18: library part CMP-03913-53914590-2, "WCAP-ASLI Aluminum Electrolytic Capacitors", Capacitance=47µF, Case/Package=Radial, ESR (Equivalent Series Resistance)=397.678mΩ, Insulation Resistance=2.12766MΩ, Leakage Current=11.75µA, Max Operating Temperature=105°C, Min Operating Temperature=-55°C, Ripple Current=220mA, Tolerance=20%, Voltage Rating=25V, Diameter=6.3mm, Height=5.5mm, Height - Seated (Max)=5.5118mm, Impedance=560mΩ, Length=5.5mm, Life (Hours)=2000hours, Mount="Surface Mount", Polarity=Polar, REACH SVHC=Unknown, Ripple Current (AC)=220mA, RoHS=Compliant, Voltage Rating (DC)=25V, Width=6.6mm
D1 D2 D3 D4 D5 D6: library part CMP-00030-39729854-1, "TEFT4300 PHOTOTRANSISTOR 3.0MM WIDE VIEW / Phototransistor IR Chip Silicon 925nm 2-Pin T-1", Case/Package=T, Collector Emitter Breakdown Voltage=70V, Collector Emitter Saturation Voltage=300mV, Dark Current=200nA, Max Collector Current=50mA, Max Operating Temperature=100°C, Max Power Dissipation=100mW, Min Operating Temperature=-40°C, Collector Emitter Voltage (VCEO)=70V, Fall Time=2.3µs, Height=4.5mm, Lead Free="Lead Free", Length=3.2mm, Lens Style=Domed, Mount="Through Hole", NexarPartId=39729854, Number of Channels=1, Number of Elements=1, Number of Pins=2, Orientation="Top View", Polarity=NPN, Power Consumption=100mW, Power Dissipation=100mW, Radiation Hardening=No, REACH SVHC=Unknown, Rise Time=2µs, RoHS=Compliant, Schedule B="8541407080, 8541407080", Viewing Angle=30°, Wavelength=925nm, Width=3.9mm
D7: library part LED_0603_RED, "LED 0603 RED SMD"
DMUX1: library part CMP-015-00008-1, "3-line to 8-line inverting and noninverting decoder and demultiplexer with high-speed CMOS logic 16-TSSOP -40 to 125", Case/Package=TSSOP, Pins=16
DRV1 DRV2: library part CMP-051-000000-5, "Motor Drives", Manufacturer_Name="Texas Instruments", Mouser Part Number=595-DRV8251DDAR, Datasheet Link=https://www.arrow.com/en/products/drv8251ddar/texas-instruments?region=nac, Design Item ID=DRV8251DDAR, Geometry.Height=1.7mm, Manufacturer_Part_Number=DRV8251DDAR, Mouser Price/Stock=https://www.mouser.co.uk/ProductDetail/Texas-Instruments/DRV8251DDAR?qs=doiCPypUmgHTzZyfapGahQ%3D%3D, Source=DRV8251DDAR.SchLib
IR1 IR2 IR3 IR4 IR5 IR6: library part CMP-004-00035-3, "SFH 4545 Osram Opto, 950nm IR LED, 5 mm Through Hole package", Manufacturer_Name="ams OSRAM", Manufacturer_Part_Number="SFH 4545", Mouser Part Number=720-SFH4545, Datasheet Link=https://datasheet.datasheetarchive.com/originals/distributors/DKDS41/DSANUWW0036915.pdf, Design Item ID=SFH_4545, Geometry.Height=8.3mm, Mouser Price/Stock=https://www.mouser.co.uk/ProductDetail/ams-OSRAM/SFH-4545?qs=VcOkZLzzaubOJpq6Xyji1A%3D%3D, Source=SFH_4545.SchLib
J1 J2: library part CMP-067-000000-3, "Socket; wire-board; male; PH; 2mm; PIN: 6; THT; 100V; 2A; -25÷85°C", Package=None, Availability=Unavailable, Component Type=Standard, Design Item ID=B6B-PH-K-S(LF)(SN), MF="{'manufacturer': u'JST Sales America Inc.'}", MP=B6B-PH-K-S(LF)(SN), Pin Count=6, Price=None, Source=B6B-PH-K-S(LF)(SN).SchLib
J3: library part CMP-002-00074-2, "Conn Unshrouded Header HDR 14 POS 1.27mm Solder ST Top Entry SMD TIGER CLAW T/R", Manufacturer_Name=SAMTEC, Manufacturer_Part_Number=FTSH-107-01-L-DV-K-TR, Mouser Part Number=200-FTSH10701LDVKTR, Datasheet Link=https://suddendocs.samtec.com/prints/ftsh-1xx-xx-xxx-dv-xxx-xxx-x-xx-mkt.pdf?_gl=1*mdiyn1*_ga*MTcyMTUxMTIwMy4xNzEyMDQxMTc2*_ga_3KFNZC07WW*MTcxMjEzMDIxOS4yLjEuMTcxMjEzMDI1NC4yNS4wLjA., Design Item ID=FTSH-107-01-L-DV-K-TR, Geometry.Height=6.25mm, Mouser Price/Stock=https://www.mouser.co.uk/ProductDetail/Samtec/FTSH-107-01-L-DV-K-TR?qs=%252BZP6%2F%252BtExtDlh0wyxE013Q%3D%3D, Source=FTSH-107-01-L-DV-K-TR.SchLib
J4: library part CMP-002-00075-2, "Conn Shrouded Header (4 Sides) HDR 4 POS 2mm Solder ST Thru-Hole Box", Max Operating Temperature=85°C, Min Operating Temperature=-25°C, Voltage Rating=100V, Connector Type="Male Pin", Mounting Technology="Through Hole", Pins=4
J5: library part CMP-002-00076-1, "CONNECTOR HEADER, XH SERIES, 2 POSITION, 2.50MM, Press-Fit Solder, Detent Lock, Natural", Max Current Rating=3A, Max Operating Temperature=85°C, Min Operating Temperature=-25°C, Voltage Rating=250V, Connector Type="Male Pin", Mounting Technology="Through Hole", Pins=2
Q1 Q2 Q3 Q4 Q5 Q6: library part CMP-072-000000-2, "IRLML6344TRPBF N-channel MOSFET Transistor, 5 A, 30 V, 3-Pin SOT-23", Manufacturer_Name=Infineon, Mouser Part Number=942-IRLML6344TRPBF, Datasheet Link=https://www.infineon.com/dgdl/irlml6344pbf.pdf?fileId=5546d462533600a4015356689c44262c, Design Item ID=IRLML6344TRPBF, Geometry.Height=1.12mm, Manufacturer_Part_Number=IRLML6344TRPBF, Mouser Price/Stock=https://www.mouser.co.uk/ProductDetail/Infineon-Technologies/IRLML6344TRPBF?qs=9%252BKlkBgLFf2w4qS48UOXVw%3D%3D, Source=IRLML6344TRPBF.SchLib
R1: library part RES_0402, "Resistor SMD 0402"
R2 R3 R4 R5 R6 R7 R8 R10 R11 R13 R14 R16 R17 R19 R20 R22 R23 R25 R26 R27 R28 R29 R30 R31 R32 R33 R34 R35 R36 R37: library part RES_0603, "Resistor SMD 0603"
R9 R12 R15 R18 R21 R24: library part RES_1206, "Resistor SMD 1206"
S1: library part CMP-069-000000-2, "8.6 x 4.5 x 6.2 mm, 5 mm Raised Slide Actuator, Right Angle, Through Hole, Slide Switch", Package=None, Availability=Unavailable, Component Type=Standard, Design Item ID=SLW-864574-5A-RA-N-D, MF="{'manufacturer': u'Same Sky (Formerly CUI Devices)'}", MP=SLW-864574-5A-RA-N-D, Pin Count=3, Price=None, Source=SLW-864574-5A-RA-N-D.SchLib
SW1 SW2: library part CMP-011-00013-1, "Tactile Switch, 0.05A, 16Vdc, 260Gf, Smd Rohs Compliant: Yes", Current Rating=50mA, Max Operating Temperature=85°C, Min Operating Temperature=-40°C, Voltage Rating=16V, Mounting Technology="Surface Mount", RoHS Compliant=Yes, Throw Configuration=SPST
U1: library part CMP-12105-000053-1, "MAINSTREAM ARM CORTEX-M4 CORE WI", Ambient Temperature Range High=+85°C, Ambient Temperature Range Low=-40°C, Frequency=170MHz, Manufacturer=STMicroelectronics, Max Junction Temp=+105°C, Max Supply Voltage=3.6V, Min Supply Voltage=1.62V, Package=LQFP48, Temperature="-40°C to +85°C", Automotive=No, Category=IC, ComponentLink2Description=Datasheet, ComponentLink2URL=https://www.st.com/resource/en/datasheet/stm32g474ce.pdf, Core Architecture="ARM Cortex-M4", Data Bus Width=32bits, Device Class L1="Integrated Circuits (ICs)", Device Class L2="Embedded Processors and Controllers", Device Class L3=Microcontrollers, Digikey Description="MAINSTREAM ARM CORTEX-M4 CORE WI", Height=1.6mm, Interface=I2C,SPI,UART,USART,CAN,USB,LIN,IrDA,I2S,SMBus,Other, Lead Free=Yes, Manufacturer Part Number=STM32G474CET6, Memory Size=512KBytes, Memory Type=FLASH, Mouser Description="Cortex M4 512K LQFP48 85°C", Number Of A/D Converters=5, Number Of Adc Channels=20, Number Of Cores=1, Number Of I2C Channels=4, Number Of I/Os=38, Number Of Pwm Channels=12, Number Of Spi Channels=3, Number Of Timers/Counters=14, Number Of Uart Channels=4, Number Of Usb Channels=1, Octopart=https://octopart.com/stm32g474cet6-stmicroelectronics-99072248, Ram Size=128KBytes, RoHS=TRUE, Standoff Height=0.05mm, Temperature Range High=+85°C, Temperature Range Low=-40°C
U2: library part CMP-04917-000300-1, "IC REG LINEAR 3.3V 300MA SOT23-5", RoHS Compliant=Yes
U3: library part CMP-074-000000-3, "Accelerometer, Gyroscope, Temperature, 6 Axis Sensor IÂ²C, SPI Output", Package="VFLGA-14 STMicroelectronics", Check_prices=https://www.snapeda.com/parts/LSM6DSO32TR/STMicroelectronics/view-part/?ref=eda, Component Type=Standard, Design Item ID=LSM6DSO32TR, MF=STMicroelectronics, MP=LSM6DSO32TR, Pin Count=14, SnapEDA_Link=https://www.snapeda.com/parts/LSM6DSO32TR/STMicroelectronics/view-part/?ref=snap, Source=LSM6DSO32TR.SchLib
U4: library part CMP-007-00035-2, "Intelligent Control LED Integrated Light Source, 3.5 to 5.3 V, -25 to 80 degC, 4-Pin SMD, RoHS, Bulk", Manufacturer="Adafruit Industries", Package Description="4-Pin Surface Mount Device, Body 5 x 5 mm, Pitch 3.3 mm", Case/Package=WS2812B, Datasheet URL=https://cdn-shop.adafruit.com/datasheets/WS2812B.pdf, Datasheet Version=May-13, Manufacturer URL=https://www.adafruit.com/, Mounting Technology=SM, Package Reference=WS2812B, RoHS Compliant=False
VR1: library part CMP-053-000000-4, "3-V to 17-V input voltage, 3-A Eco-mode synchronous buck module", Package="PowerFQFN-7 Texas Instruments", Check_prices=https://www.snapeda.com/parts/TPSM863252RDXR/Texas+Instruments/view-part/?ref=eda, Component Type=Standard, Design Item ID=TPSM863252RDXR, MF="Texas Instruments", MP=TPSM863252RDXR, Pin Count=7, SnapEDA_Link=https://www.snapeda.com/parts/TPSM863252RDXR/Texas+Instruments/view-part/?ref=snap, Source=TPSM863252RDXR.SchLib
X1: library part CMP-031-000000-2, "Crystals 2.0x1.6mm 24MHz 6pF - 40 C to + 85 C 50 Ohms", Manufacturer_Name="Kyocera AVX", Manufacturer_Part_Number=CX2016FB24000B0FZZH1, Datasheet Link=https://ele.kyocera.com/assets/products/crystal-device/specification/CX2016FB_6pF.pdf, Design Item ID=CX2016FB24000B0FZZH1, Geometry.Height=0.55mm, Source=CX2016FB24000B0FZZH1.SchLib
X2: library part CMP-011-00014-2, "DS01C-254-S-03BE - 3 Position, Through Hole, 2.54 mm Pitch, Raised Slide Actuator, Convex Bottom, Short Pin, DIP Switch", Manufacturer_Name="Same Sky", Mouser Part Number=490-DS01C-254-S-03BE, Datasheet Link=https://www.sameskydevices.com/product/resource/DS01C-254-S-03BE.pdf, Design Item ID=DS01C-254-S-03BE, Geometry.Height=7mm, Manufacturer_Part_Number=DS01C-254-S-03BE, Mouser Price/Stock=https://www.mouser.co.uk/ProductDetail/CUI-Devices/DS01C-254-S-03BE?qs=wnTfsH77Xs7A4kzYuxObfg%3D%3D, Source=DS01C-254-S-03BE.SchLib

## Via types
v1: diameter 0.6, hole 0.3, Top Layer to Bottom Layer, tented both sides, 151 vias
v2: diameter 0.9, hole 0.6, Top Layer to Bottom Layer, tented both sides, 8 vias

## Nets (pads, with @x,y where several pads share a name; then routed paths per layer and width w, separated by ;. In a path a pad name is that pad's centre, name@x,y a point inside that pad or via, vN(x,y) a via of type N, cw(c..) or ccw(c..) an arc to the next point about the centre after c; other vN are vias at no path point)
5v_FB: R6.1 R7.2 VR1.7 | length 15.2
  Top Layer w0.2: v1(-29,-63) -28.923,-63.077 -28.923,-63.528 -28.551,-63.9 VR1.7@-27.565,-63.9 ; v1(-24.5,-60.5) -23.75,-59.75 R7.2@-23,-59.75 -22.25,-59.75 -22,-59.5 -22,-58.5 -21.75,-58.25 R6.1@-21,-58.25
  Bottom Layer w0.2: v1(-29,-63) -29.108,-63 -29.467,-62.641 -29.859,-62.641 -30,-62.5 -30,-61.5 -29,-60.5 v1(-24.5,-60.5)